# EAGLE board tick-box-1591b-standalone-mk-1.0 (EAGLE 6.5.0)
TITLE: Terribly Illuminated Chronology Keeper; VERSION: Rev 1.0
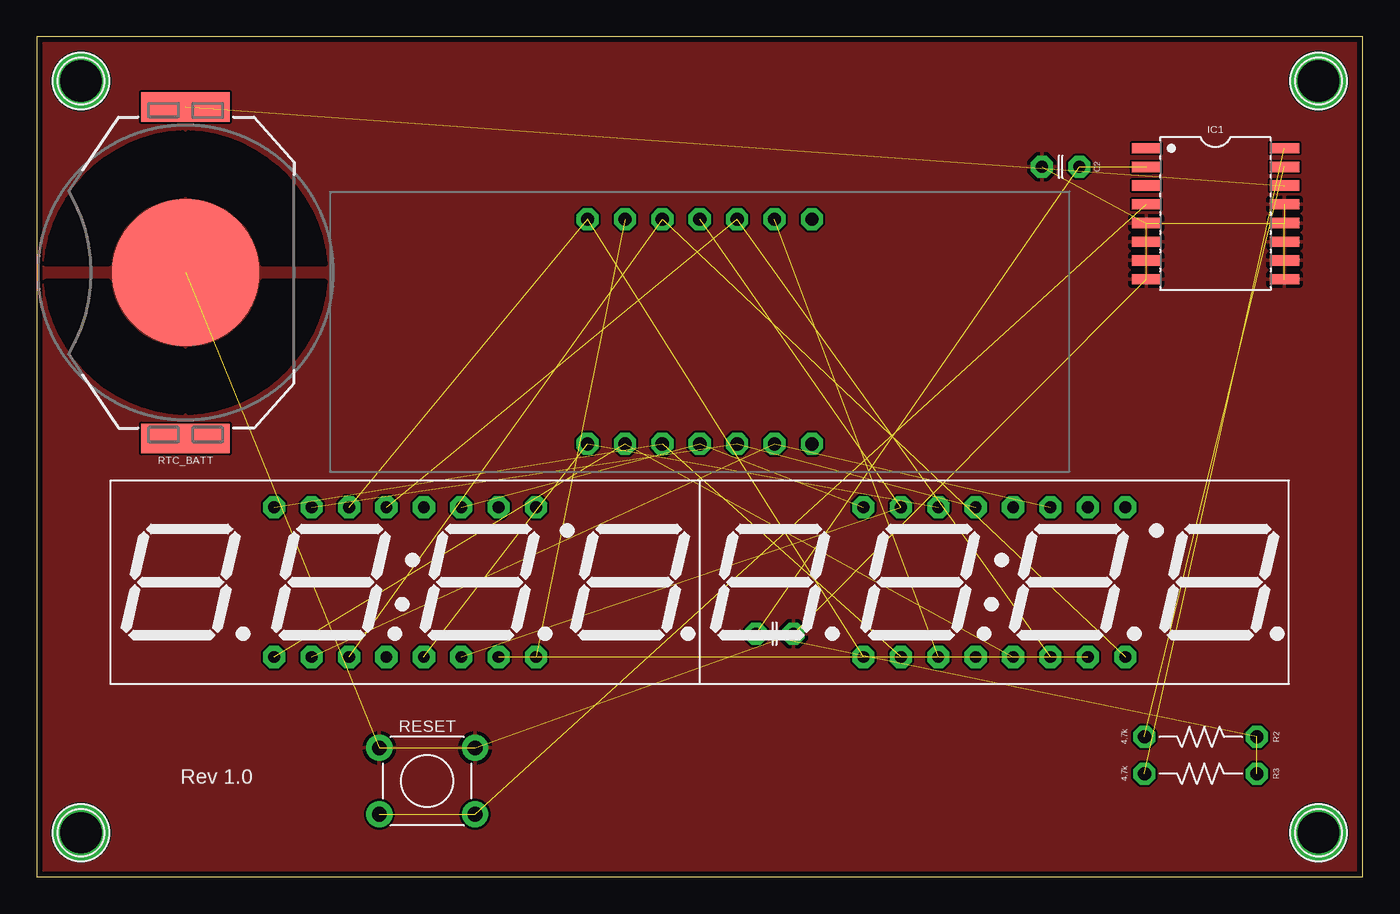
[diagram p0: board, top side]
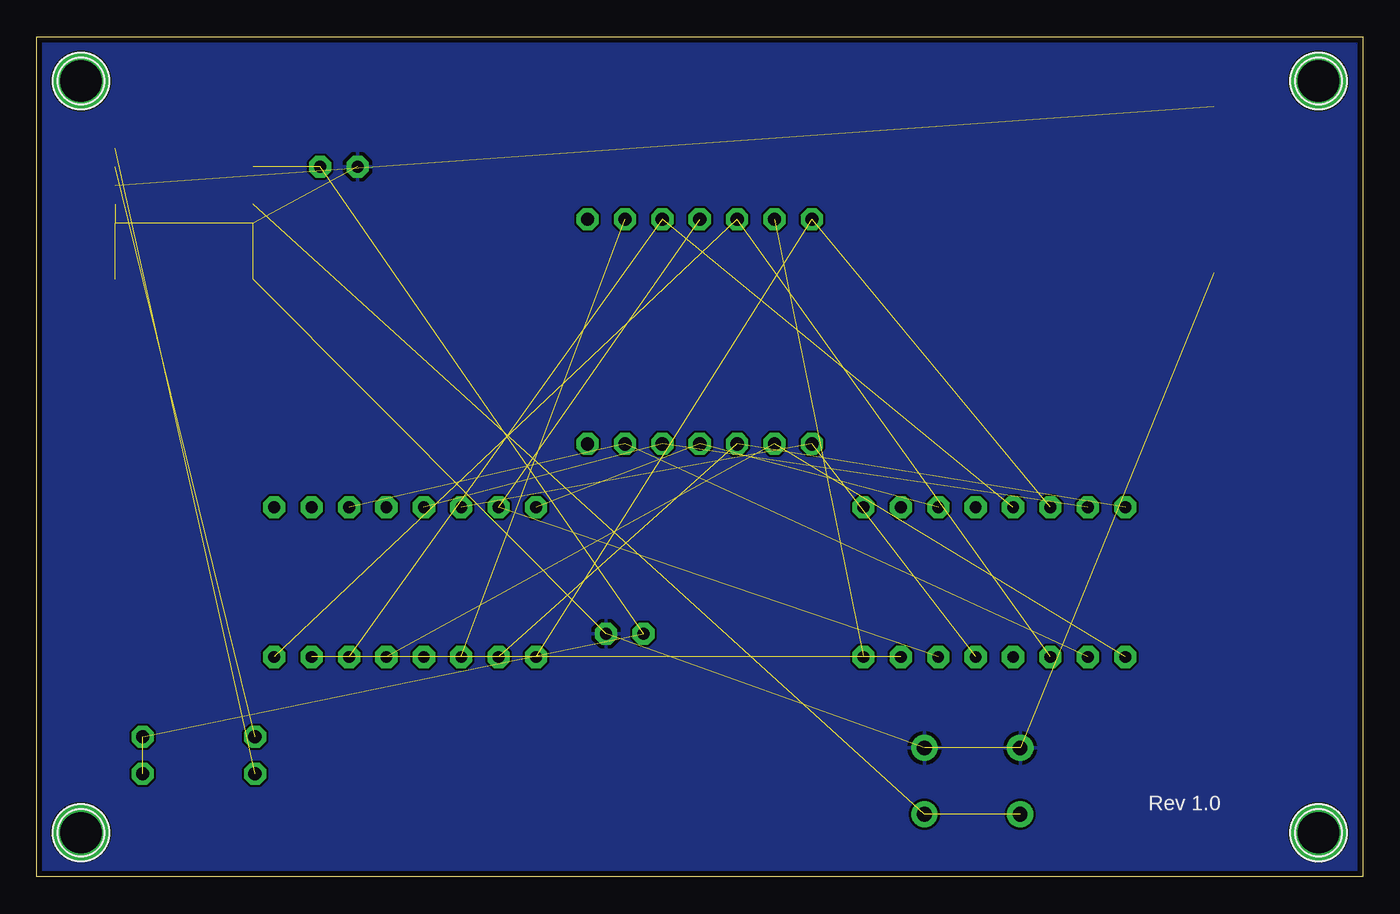
[diagram p1: board, bottom side, seen from below]

Size 90 x 57 mm. Coordinates in mm from the lower left corner, seen from the top.
Outline: 90,57 0,57 0,0 90,0 90,57
Copper layers (1*16): Top 0.0356mm / dielectric 1.5011mm / Bottom 0.0356mm
Design rules "LaenPCBOrder_2": minimum track width 6mil, minimum drill 13mil, track to track 6mil, track to pad 6mil, pad to pad 6mil, via to via 6mil, smd to smd 6mil, copper to edge 15mil, drill to drill 6mil, minimum pad ring 7mil, minimum via ring 7mil, stop-mask expansion 3mil, vias tented up to drill 20mil, thermal gap 10mil

## Footprints (pad centres in the part's own frame; a part is rotated, then mirrored left to right if it is on the bottom)
C025-024X044 = drill 0.813 pad 1.5 octagon: 1 -1.27,0; 2 1.27,0
7SEG_4DIG_NS = drill 0.9 pad 1.5 octagon: P$1 -7.62,7.62; P$2 -5.08,7.62; P$3 -2.54,7.62; P$4 0,7.62; P$5 2.54,7.62; P$6 5.08,7.62; P$7 7.62,7.62; P$8 7.62,-7.62; P$9 5.08,-7.62; P$10 2.54,-7.62; P$11 0,-7.62; P$12 -2.54,-7.62; P$13 -5.08,-7.62; P$14 -7.62,-7.62
7SEG_4DIG_10MM = drill 0.8 pad 1.5 octagon: 1 -8.89,-5.08; 2 -6.35,-5.08; 3 -3.81,-5.08; 4 -1.27,-5.08; 5 1.27,-5.08; 6 3.81,-5.08; 7 6.35,-5.08; 8 8.89,-5.08; 9 8.89,5.08; 10 6.35,5.08; 11 3.81,5.08; 12 1.27,5.08; 13 -1.27,5.08; 14 -3.81,5.08; 15 -6.35,5.08; 16 -8.89,5.08
HOLE-#2 = drill 2.8 pad 3.81: P$1 0,0
SO16W = smd 0.7 x 2: 1 -4.445,-4.685; 2 -3.175,-4.685; 3 -1.905,-4.685; 4 -0.635,-4.685; 5 0.635,-4.685; 6 1.905,-4.685; 7 3.175,-4.685; 8 4.445,-4.685; 9 4.445,4.685; 10 3.175,4.685; 11 1.905,4.685; 12 0.635,4.685; 13 -0.635,4.685; 14 -1.905,4.685; 15 -3.175,4.685; 16 -4.445,4.685
RESISTOR-AXIAL-PTH-7.62MM = drill 0.9 pad 1.5 octagon: P$1 -3.81,0; P$2 3.81,0
DTS-6-SMALL-PADS = drill 1 pad 1.778: 1 -3.25,2.25; 2 3.25,2.25; 3 -3.25,-2.25; 4 3.25,-2.25
BATTCON_20MM_MINE = smd 10 x 10: BOTTOM 0,0 | smd 6 x 2: TOP@1 0,11.25; TOP@2 0,-11.25

## Placement (x,y rotation side)
C1  1uF  [C025-024X044]  50.08,16.5 0 top
C2  0.1uF  [C025-024X044]  69.5,48.17 180 top
DISPLAY1  7SEG_4DIGIT_COLON14.2MM-CC-NS  [7SEG_4DIG_NS]  45,37 0 top
DISPLAY2  7SEG_4DIGIT_COLON_APOS  [7SEG_4DIG_10MM]  25,20 0 top
DISPLAY3  7SEG_4DIGIT_COLON_APOS  [7SEG_4DIG_10MM]  65,20 0 top
H1  HOLE#2  [HOLE-#2]  3,3 0 top
H2  HOLE#2  [HOLE-#2]  87,3 0 top
H3  HOLE#2  [HOLE-#2]  3,54 0 top
H4  HOLE#2  [HOLE-#2]  87,54 0 top
IC1  DS3231  [SO16W]  80,45 270 top
R2  4.7k  [RESISTOR-AXIAL-PTH-7.62MM]  79,9.5 180 top
R3  4.7k  [RESISTOR-AXIAL-PTH-7.62MM]  79,7 180 top
RESET  SPST-NO-TACT6MM-PTH-SMALL-PADS  [DTS-6-SMALL-PADS]  26.5,6.5 0 top
RTC_BATT  CR2032  [BATTCON_20MM_MINE]  10.1,41 180 top

## Library data of the parts
C1 C2 DISPLAY1-DISPLAY3 H1-H4 IC1 R2 R3 RESET RTC_BATT = A_butts

## Nets
A0: DISPLAY1.P$12 DISPLAY2.16 DISPLAY3.2
A1: DISPLAY1.P$5 DISPLAY2.13 DISPLAY3.6
A2: DISPLAY1.P$3 DISPLAY2.3 DISPLAY3.8
D2: DISPLAY1.P$14 DISPLAY2.5 DISPLAY3.14
D3: DISPLAY1.P$11 DISPLAY2.11 DISPLAY3.16
D4: DISPLAY1.P$10 DISPLAY2.15 DISPLAY3.13
D5: DISPLAY1.P$6 DISPLAY2.7 DISPLAY3.3
D6: DISPLAY1.P$13 DISPLAY2.1 DISPLAY3.5
D7: DISPLAY1.P$9 DISPLAY2.2 DISPLAY3.11
D8: DISPLAY1.P$4 DISPLAY2.6 DISPLAY3.15
D9: DISPLAY1.P$2 DISPLAY2.8 DISPLAY3.7
D10: DISPLAY1.P$1 DISPLAY2.14 DISPLAY3.1
GND: C1.2 C2.2 IC1.5 IC1.6 IC1.7 IC1.8 IC1.9 IC1.10 IC1.11 IC1.12 IC1.13 RESET.1 RESET.2 RTC_BATT.BOTTOM
RST: IC1.4 RESET.3 RESET.4
SCL: IC1.16 R3.P$2
SDA: IC1.15 R2.P$2
VBAT: IC1.14 RTC_BATT.TOP@2
VCC: C1.1 C2.1 IC1.2 R2.P$1 R3.P$1

## Tracks (layer width: path | path; a pad name or v marks a point on that pad's centre or on a via)
A0  (2 unrouted)
A1  (2 unrouted)
A2  (2 unrouted)
D2  (2 unrouted)
D3  (2 unrouted)
D4  (2 unrouted)
D5  (2 unrouted)
D6  (2 unrouted)
D7  (2 unrouted)
D8  (2 unrouted)
D9  (2 unrouted)
D10  (2 unrouted)
GND  (13 unrouted)
  pour Top: 0.1,0 0,0 0,57 90,57 90,0
  pour Bottom: 0.1,0 0,0 0,57 90,57 90,0
RST  (2 unrouted)
SCL  (1 unrouted)
SDA  (1 unrouted)
VBAT  (1 unrouted)
VCC  (4 unrouted)